# Altium PCB Pcb.PcbDoc
Units mil, origin at the board's own origin, x right, y up, seen from the top; angles counter-clockwise.
Board outline 3220 x 2325 mil, 2 copper layers (Top Layer, Bottom Layer); 32 components, 24 nets, 118 pads, 26 vias.
Unrouted connection lines stored in the file: 4.
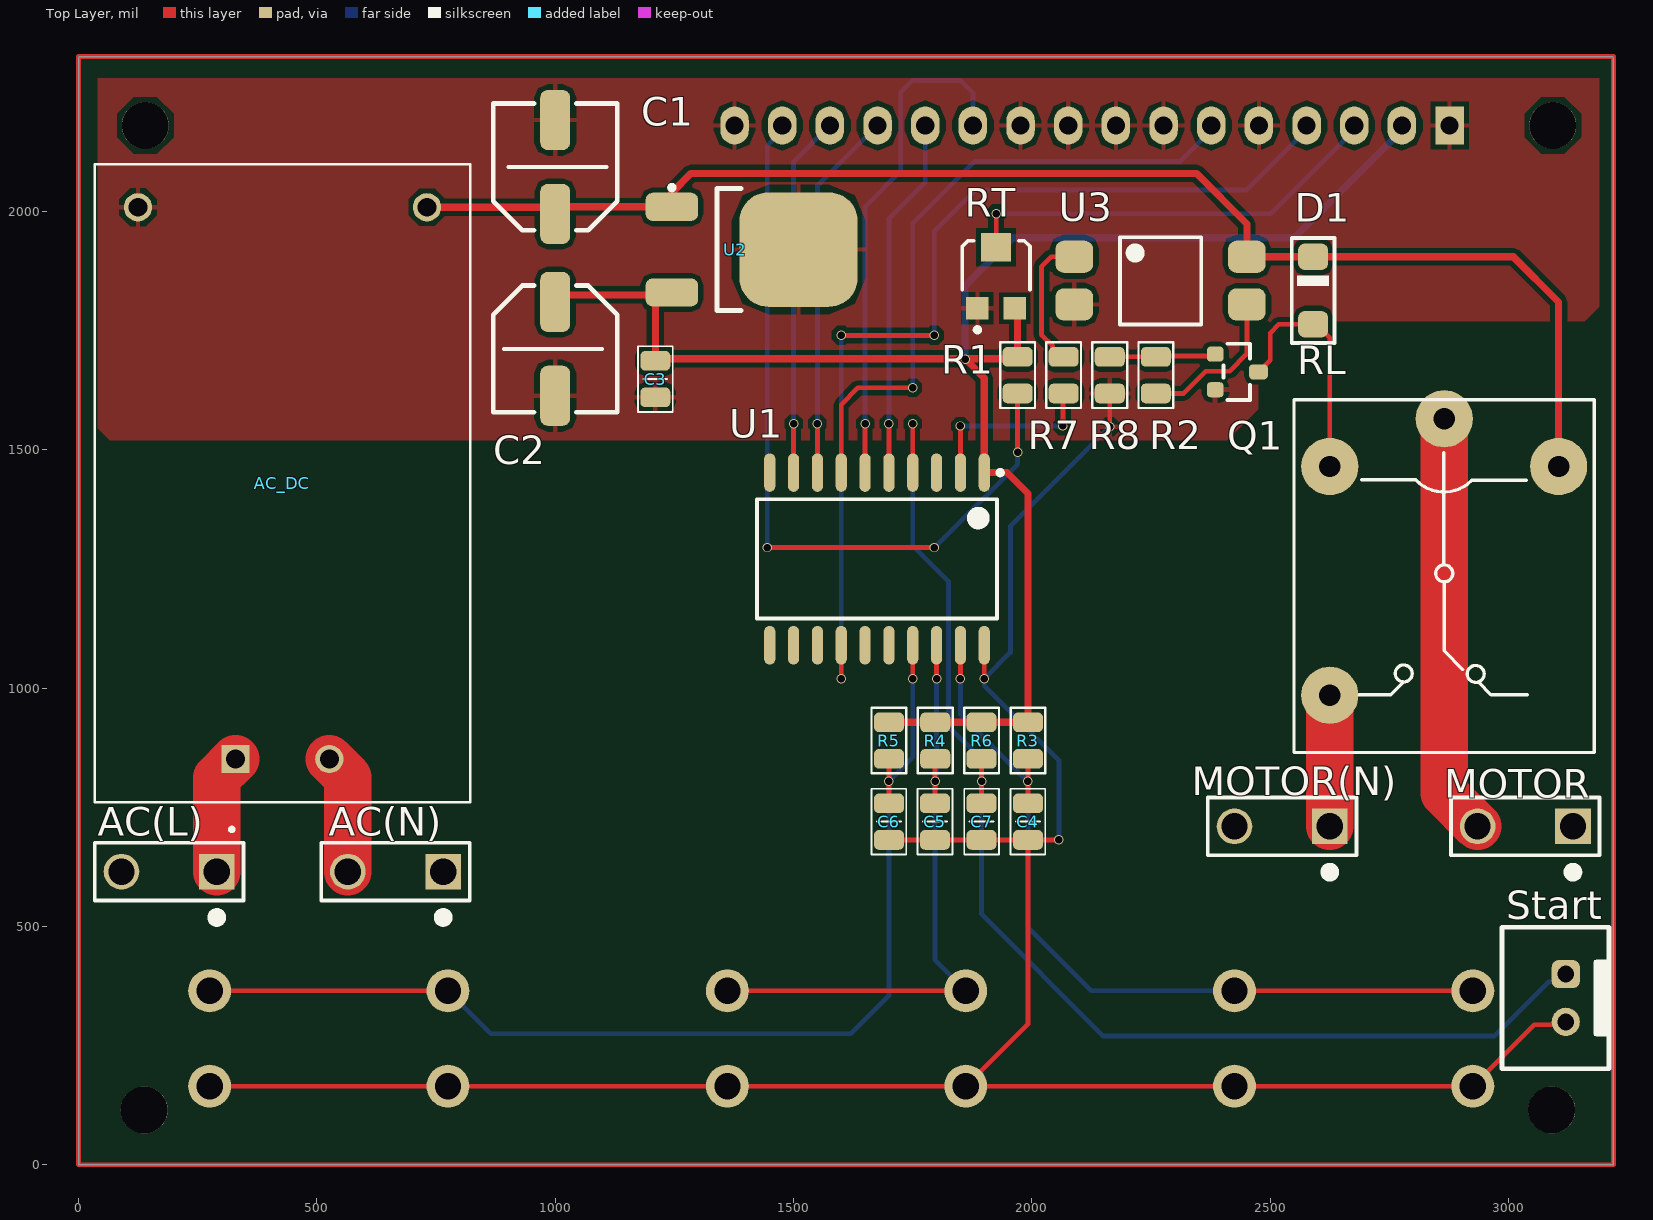
[diagram p0: Top Layer view]
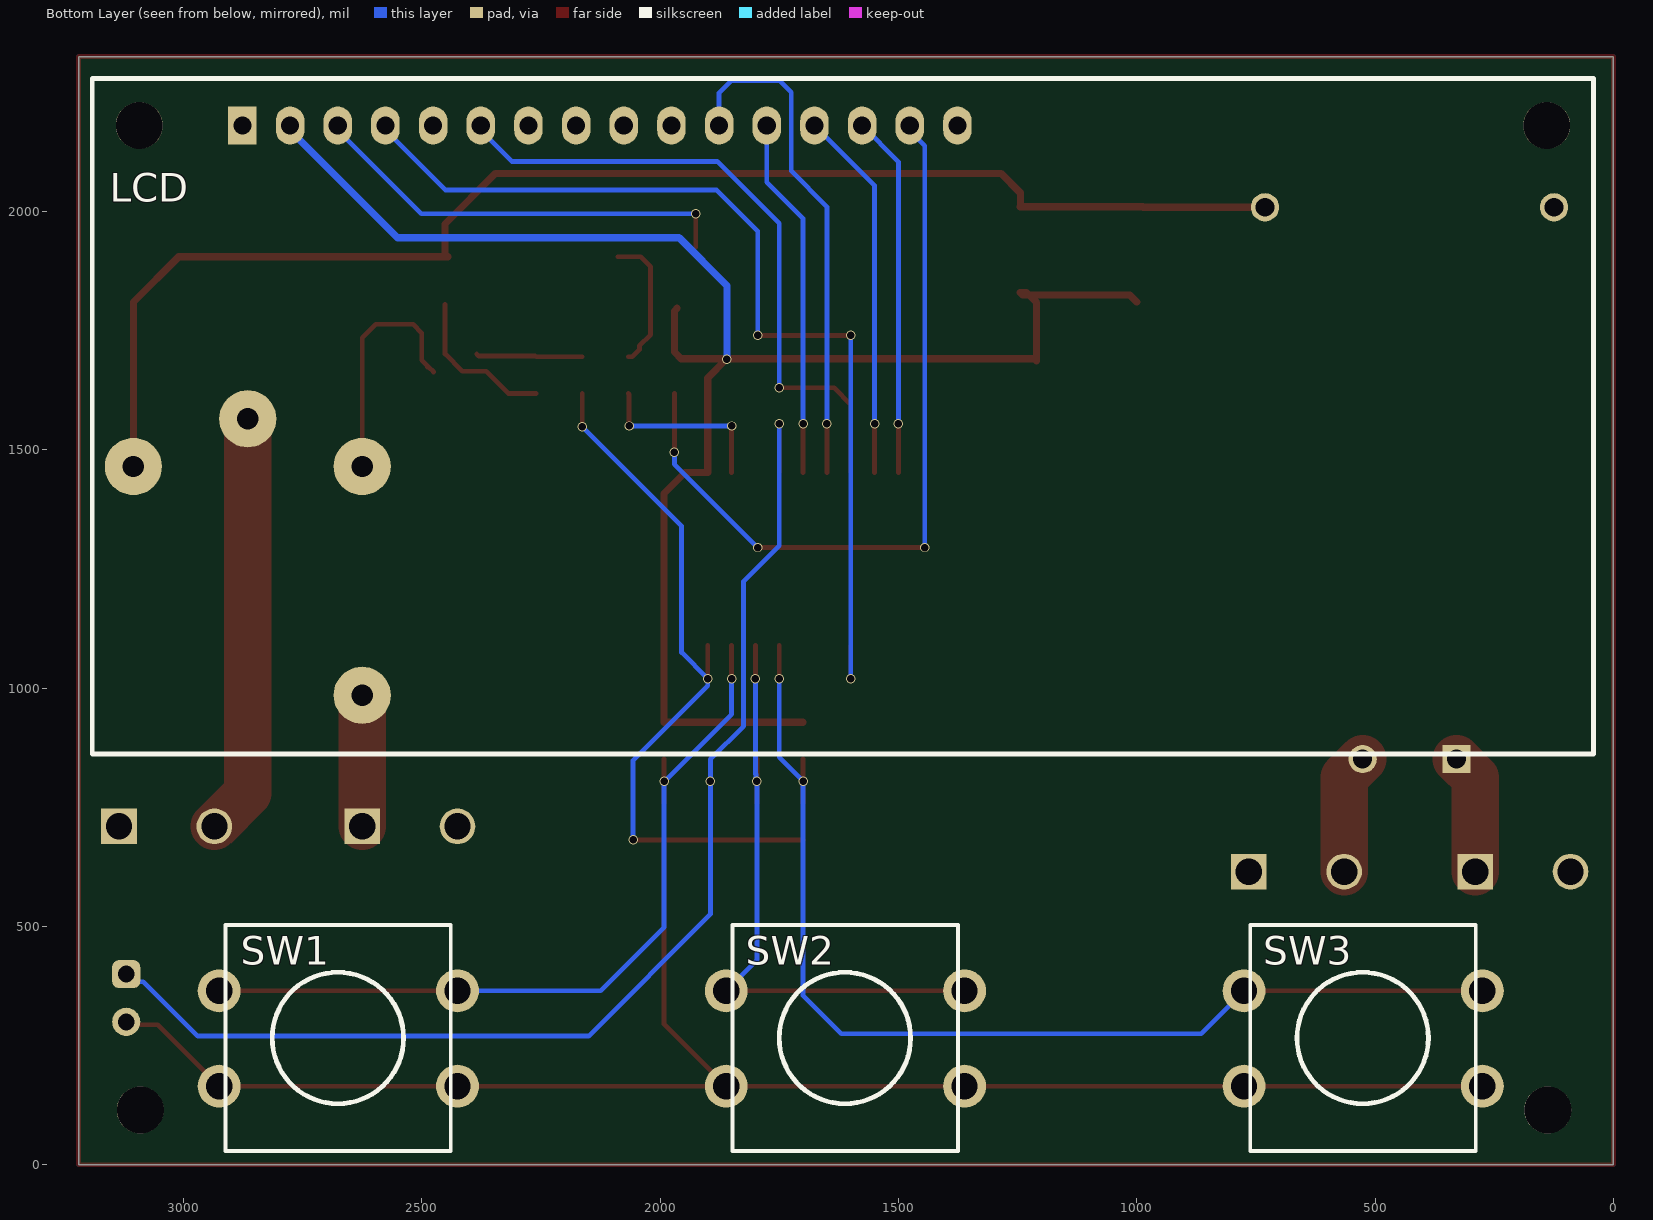
[diagram p1: Bottom Layer view, seen from below]

## Layer stack, top to bottom
Top Solder: solder mask 0.4, Solder Resist, Dk 3.5
Top Layer: signal copper 1.4
Dielectric 1: dielectric 12.6, FR-4, Dk 4.8
Bottom Layer: signal copper 1.4
Bottom Solder: solder mask 0.4, Solder Resist, Dk 3.5

## Board outline
0,0 0,2325 3220,2325 3220,0

## Design rules (kind name [scope] priority, off if disabled: settings)
Clearance [All] p1: gap=10 ignorepadtopadclearanceinfootprint=FALSE except(0: Arc-Hole Track-Hole SMDPad-Hole THPad-Hole Via-Hole Fill-Hole Poly-Hole Region-Hole Text-Hole)
PolygonConnect [All] p1: connectstyle=Relief reliefconductorwidth=10 reliefentries=4 polygonreliefangle="90 Angle" airgapwidth=10
RoutingVias [All] p1: holewidth=15.75 width=19.68 viastyle="Through Hole" minholewidth=15.75 minwidth=19.68 maxholewidth=15.75 maxwidth=19.68
SolderMaskExpansion [All] p1: expansion=4 istentingtop=FALSE
Width Power(5-12) [InNet('+12')] p1: maxlimit=15 minlimit=15 preferedwidth=15
Width 220V [InNet('NetAC(L)_1')] p2: maxlimit=100 minlimit=100 preferedwidth=100
Width Signal [All] p3: maxlimit=20 minlimit=10 preferedwidth=10 minimp=50.000000 maximp=50.000000 favimp=50.000000
30 further rules are at their usual default settings.

## Classes and differential pairs
component class Schematic: AC(L) AC_DC C1 C2 C3 C4 C5 C6 C7 D1 LCD MOTOR(N) Q1 R1 R2 R3 R4 R5 R6 R7 R8 RL RT Start SW1 SW2 SW3 U1 U2 U3

## Components (designator, comment, footprint, x,y, rotation, side; value= is the part's Value field where it differs from the comment)
AC(L) "63824-1" TECO-63824-1_V 190,615 r180 top
AC(N) "63824-1" TECO-63824-1_V 665,615 r180 top
AC_DC "HLK-PM01" CONV_HLK-PM01 427.8,1430 r90 top
C1 "25v/220uF" "C SMD ALU (D8)" 1000,2093.43 r90 top
C2 "16V/220uF" "C SMD ALU (D8)" 1000,1711.81 r270 top
C3 "104" "C 0805 (2012)" 1210,1648.39 r270 top
C4 "104" "C 0805 (2012)" 1991.67,720 r270 top
C5 "104" "C 0805 (2012)" 1796.67,720 r270 top
C6 "104" "C 0805 (2012)" 1700,720 r270 top
C7 "104" "C 0805 (2012)" 1894.44,720 r270 top
D1 "Diode" SOD-80 2590,1834.13 r90 top
LCD "LCD 16x2" "LCD 16x2" 2876.22,2180.47 r180 bottom
MOTOR "63824-1" TECO-63824-1_V 3035,710 r180 top (schematic designator AC(N)_M)
MOTOR(N) "63824-1" TECO-63824-1_V 2525,710 r180 top (schematic designator MOTOR)
Q1 "Transistor NPN" SOT-23 2429.9,1663.41 r0 top
R1 "470" "R 0805 (2012)" 1970,1656.61 r270 top
R2 "470" "R 0805 (2012)" 2260,1656.61 r270 top
R3 "10k" "R 0805 (2012)" 1991.67,890 r90 top
R4 "10k" "R 0805 (2012)" 1797.22,890 r90 top
R5 "10k" "R 0805 (2012)" 1700,890 r90 top
R6 "10k" "R 0805 (2012)" 1894.44,890 r90 top
R7 "1k" "R 0805 (2012)" 2066.67,1656.61 r270 top
R8 "47k" "R 0805 (2012)" 2163.33,1656.61 r270 top
RL "Relay 10A/12V" RL_SPDT_10A 2865,1565 r270 top value="Relay SPDT, 10A, 12V"
RT "TC33X-2-103E" BOUR-TC33X-2_V 1925,1867.91 r90 top
Start "Header 2" XH2.54-2P 3120,400 r270 top
SW1 "Tact Switch" "SW/4/DIP 12x12x7" 2425,365 r0 bottom
SW2 "Tact Switch" "SW/4/DIP 12x12x7" 1361.3,365 r0 bottom
SW3 "Tact Switch" "SW/4/DIP 12x12x7" 275,365 r0 bottom
U1 "PIC16F1829-I/SO" MCHP-SOIC-SO20_N 1675,1271.1 r270 top
U2 "L7xxx" "TO-252 (DPAK)" 1420,1920 r0 top
U3 "PC817B" SOIC-4-GULLWING 2270,1855 r0 top

## Footprints (in the part's own frame and the unit in brackets; to place one, negate y for a bottom-side part, rotate by r counter-clockwise, add the part's x,y. Pads: shape width x height; smd on the part's side, far side on the other; paste and mask are expansions set on the pad)
BOUR-TC33X-2_V [mm] "SMD, 3-Leads, Body 3.8x3.6mm"
  rect 1.2x1.2 smd: 1(-1.8,1) 3(-1.8,-1)
  rect 1.5x1.6 smd: 2(1.45,0)
  silkscreen extent -3.07,-1.8 1.8,1.8, body extent -2,-1.8 1.96,1.8, height 1.15
"C 0805 (2012)" [mm] "Chip Capacitor, 2-Leads, Body 2.0x1.3mm, IPC Medium Density"
  rrect50% 1.05x1.6 smd: 1(-0.975,0) 2(0.975,0)
  silkscreen extent -1.75,-0.92 1.75,0.92, body extent -1,-0.62 1,0.63, height 0.6
"C SMD ALU (D8)" [mm] "SMD Aluminum Electrolytic Capacitor, size D8 (6.3 x 7.7 mm)"
  rrect50% 3.2x1.6 smd: 1(-2.5,0) 2(2.5,0)
  silkscreen extent -3.37,-3.31 3.37,3.31, body extent -3.5,-3.31 3.5,3.29, height 7.7
CONV_HLK-PM01 [mm]
  rect 1.508x1.508 / inner round 1.508 / far side rect 1.508x1.508 hole 1: 1(-14.7,2.5)
  round 1.508 hole 1: 2(-14.7,-2.5) 3(14.7,7.7) 4(14.7,-7.7)
  silkscreen extent -18.55,-10 17,10, body extent -17,-10.1 17,10.1, height 15
"LCD 16x2" [mil]
  rect 60x80 / inner round 60 / far side rect 60x80 hole 38: 1(0,0)
  oval 60x80 / inner round 60 / far side oval 60x80 hole 38: 2(100,0) 3(200,0) 4(300,0) 5(400,0) 6(500,0) 7(600,0) 8(700,0) 9(800,0) 10(900,0) 11(1000,0) 12(1100,0) 13(1200,0) 14(1300,0) 15(1400,0) 16(1500,0)
  round 98.43 hole 98.43: HOLE(-216.54,0) HOLF(2736.22,0)
  round 0 on Top Overlay: HOLG(2736.22,-1220.47) HOLH(-216.54,-1220.47)
  silkscreen extent -315,-1319 2835,98, body extent -314,-1318 2845,100, height 710
MCHP-SOIC-SO20_N [mm] "SOIC, 20-Leads, Body 12.8x7.5mm, Pitch 1.27mm, IPC Medium Density"
  oval 2.05x0.6 smd: 1(-4.6,5.715) 2(-4.6,4.445) 3(-4.6,3.175) 4(-4.6,1.905) 5(-4.6,0.635) 6(-4.6,-0.635) 7(-4.6,-1.905) 8(-4.6,-3.175) 9(-4.6,-4.445) 10(-4.6,-5.715) 11(4.6,-5.715) 12(4.6,-4.445) 13(4.6,-3.175) 14(4.6,-1.905) 15(4.6,-0.635) 16(4.6,0.635) 17(4.6,1.905) 18(4.6,3.175) 19(4.6,4.445) 20(4.6,5.715)
  silkscreen extent -4.72,-6.4 3.18,6.69, body extent -3.75,-6.4 3.75,6.4, height 2.65
"R 0805 (2012)" [mm] "Chip Resistor, 2-Leads, Body 2.0x1.3mm, IPC Medium Density"
  rrect50% 1.05x1.6 smd: 1(-0.975,0) 2(0.975,0)
  silkscreen extent -1.75,-0.92 1.75,0.92, body extent -1,-0.61 1,0.59, height 0.5
RL_SPDT_10A [mil] "Relay SPDT, 5 pin, 10A,W 650mil, L 800mil, H 800mil"
  round 120 hole 45: 1(0,0) 3(580,-240) 4(100,-240) 5(100,240)
  round 0 all layers, no hole: 2(580,240)
  silkscreen extent -40,-315 700,315, body extent -31,-305 721,305, height 602
SOD-80 [mm] "SOD-80 MiniMelf Diod case LL4148 3.7x1.6x0.5mm"
  rrect50% 1.4x1.6 smd: 1(1.8,0) 2(-1.8,0)
  silkscreen extent -2.79,-1.14 2.79,1.14, body extent -1.8,-0.74 1.8,0.76, height 1.5
SOIC-4-GULLWING [mm]
  rrect50% 2x1.71 smd: 1(-4.6,1.27) 2(-4.6,-1.27) 3(4.6,-1.27) 4(4.6,1.27)
  silkscreen extent -2.16,-2.34 2.16,2.31, body extent -5,-2.29 5,2.29, height 3.83
SOT-23 [mm] "SOT23, 3-Leads, Body 3.0x2.5mm (max), Pitch 0.95mm, IPC Medium Density"
  rrect50% 0.9x0.8 smd: 1(-1.15,0.95) 2(-1.15,-0.95)
  rrect50% 1x0.8 smd: 3(1.15,0)
  silkscreen extent -0.71,-1.5 0.7,1.5, body extent -1.28,-1.46 1.27,1.46, height 0.95
"SW/4/DIP 12x12x7" [mil]
  round 90 hole 55: 1(0,0) 4(500,0)
  round 90 hole 55 mask+4: 2(0,200) 3(500,200)
  silkscreen extent 14,-138 487,336, body extent -11,-137 511,335, height 309
TECO-63824-1_V [mm] "THD, 2-Leads, Body 7.92x3.08mm, Pitch 5.08mm"
  rect 1.9x1.9 hole 1.4: 1(-2.54,0)
  round 1.9 hole 1.4: 2(2.54,0)
  silkscreen extent -3.96,-1.54 3.96,2.69, body extent -3.96,-1.55 3.96,1.54, height 10.21
"TO-252 (DPAK)" [mm] "D-PAK, 3-Pads, Body 6.2x6.7mm (max), IPC Medium Density"
  rrect50% 2.8x1.5 smd: 1(-4.45,2.28) 3(-4.45,-2.28)
  rrect50% 6.3x6.1 smd: 2(2.3,0)
  silkscreen extent -4.57,-3.25 -0.75,3.43, body extent -5,-3.27 4.94,3.27, height 2.41
XH2.54-2P [mm]
  rrect50% 1.5x1.5 hole 0.9: 1(0,0)
  round 1.5 hole 0.9 mask+0.102: 2(2.54,0)
  silkscreen extent -2.5,-3.4 5.04,2.4, body extent -2.47,-3.4 5.03,2.4, height 7.25

## Part data
AC(L) AC(N) MOTOR MOTOR(N): library part CMP-1684-00002-4, "Printed Circuit Board Terminal and Disconnect, 2-Pin THD, RoHS, Tape and Reel", Colour=Silver, Manufacturer="TE Connectivity", Package Quantity=10000, ComponentLink1Description="Manufacturer URL", ComponentLink1URL=http://www.te.com/, ComponentLink2Description=Datasheet, ComponentLink2URL=http://www.te.com/commerce/DocumentDelivery/DDEController?Action=showdoc&DocId=Customer+Drawing%7F63824%7FR%7Fpdf%7FEnglish%7FENG_CD_63824_R_baseFilename.pdf%7F63824-1, Contact Material=Brass, Contact Plating=Tin, DatasheetVersion="Rev. R, 06/2013", Length="13.63 mm", Mounting Technology="Through Hole", PackageDescription="2-Pin Through Hole Device, Body 7.92 x 3.08 mm, Pitch 5.08 mm", PackageReference=63824-1, Packaging="Tape and Reel", REACH SVHC=Unknown, RoHSCompliant=True
AC_DC: "The HLK-PM01 is a small size low cost AC to DC converter which can take in 110V/220V AC at 50/60 Hz and give 5V 3W output. The module is can be used in designs which run on 5V and needs to be powered form the AC mains.", Package=None, Availability="Not in stock", Check_prices=https://www.snapeda.com/parts/hlk-pm01/Hi-link/view-part/?ref=eda, MF=Hi-link, MP=hlk-pm01, Price=None, SnapEDA_Link=https://www.snapeda.com/parts/hlk-pm01/Hi-link/view-part/?ref=snap
C1 C2: library part Capacitor, "Capacitor pol"
C3 C4 C5 C6 C7: library part "Capacitor NP", "Capacitor non-pol"
D1: "Default Diode", Code_JEDEC=DO-214-AB, LatestRevisionDate=17-Jul-2002, LatestRevisionNote="Re-released for DXP Platform.", PackageReference=SMC, PackageVersion=Sep-1996, Published=8-Jun-2000, Publisher="Altium Limited"
LCD: "Character LCD 16x2"
Q1: "NPN Bipolar Transistor"
R1 R2 R3 R4 R5 R6 R7 R8: library part Resistor, "Resistor", LatestRevisionDate=17-Jul-2002, LatestRevisionNote="Re-released for DXP Platform.", PackageReference=AXIAL-0.3, Published=8-Jun-2000, Publisher="Altium Limited"
RL: library part "Relay 1", "Relay SPDT,10A - 12VDC 5 Pin"
RT: library part CMP-2100-03695-1, "Trimming Potentiometer, 10000 Ohm, -40 to 100 degC, 3-Pin SMD, RoHS, Tape and Reel", Case/Package=SMD/SMT, Colour=Silver, Manufacturer=Bourns, Max Operating Temperature=100degC, Max Power Dissipation=100mW, Min Operating Temperature=-40degC, Package Description="3-Pin Surface Mount Device, Body 3.8 x 3.6 mm", Package Quantity=2500, Package Reference=TC33X-2, Resistance=10KOhm, Temperature Coefficient=250ppm/degreesC, Tolerance=25%, Voltage Rating (DC)=50V, Composition=Potentiometer, Contact Plating=Silver, Datasheet URL=http://www.bourns.com/docs/Product-Datasheets/TC33.pdf, Datasheet Version=42583.0, Depth=3.8mm, Height=0.047inch, Lead Free=LeadFree, Length=3mm, Manufacturer URL=http://www.bourns.com/, Military Standard=Not, Mount=SurfaceMount, Number of Turns=1, Packaging=TapeandReel, Power Rating=100mW, Radiation Hardening=No, REACH SVHC=NoSVHC, RoHSCompliant=true, Taper=Linear, Termination=FootPrint, Weight=29.4mg, Width=0.118inch
Start: "Header, 2-Pin", LatestRevisionDate=17-Jul-2002, LatestRevisionNote="Re-released for DXP Platform.", Publisher="Altium Limited"
SW1 SW2 SW3: library part "SW SPST-4", "Tact switch 4 pin"
U1: library part CMP-0115-02414-1, "Flash Microcontroller with XLP Technology, 32 MHz, 17 I/O, -40 to 85 degC, 20-pin SOIC (SO20), Tube", Manufacturer=Microchip, Operation Voltage Range="1.8V - 5.5V", # of A/D Channels=12, ComponentLink1Description=Datasheet, ComponentLink1URL=http://ww1.microchip.com/downloads/en/DeviceDoc/41440C.pdf, ComponentLink2Description="Package Specification", ComponentLink2URL=http://www.microchip.com/stellent/groups/techpub_sg/documents/packagingspec/en012702.pdf, ComponentLink3Description="URL Link1", ComponentLink3URL="Product URL:http://www.microchip.com/datasheet/PIC16F1829", DatasheetVersion="Rev. C", Digital Communication="1 -A/E/USART, 2 -MSSP(SPI/I2C)", EEPROM Data Memory (bytes)=256, I/O Pins=17, Internal Oscillator="32 MHz, 31 kHz", Max. CPU Speed MHz=32, Memory Type=Flash, Mounting Technology="Surface Mount", PackageDescription="20-Lead Plastic Small Outline, 7.5 x 12.8 mm Body, 1.27 mm Pitch", PackageReference=SOIC-SO20, PackageVersion="C04-094C, 12/2012", Packing=TUBE, PartNumber=PIC16F1829-I/SO, Program Memory KBytes=14, Program Memory KWords=8, RAM=1024, RoHS=TRUE, Timers="4 - 8-bit, 1 - 16-bit"
U2: "LDO Fixed Voltage regulator"
U3: library part "Opto PC817B"

## Free pads (board coordinates)
  round 98.43 hole 98.43: HOLD(137.6,115) HOLD(3090.36,115)

## Via types
v1: diameter 19.68, hole 15.75, Top Layer to Bottom Layer, 26 vias

## Nets (pads, with @x,y where several pads share a name; then routed paths per layer and width w, separated by ;. In a path a pad name is that pad's centre, name@x,y a point inside that pad or via, vN(x,y) a via of type N, cw(c..) or ccw(c..) an arc to the next point about the centre after c; other vN are vias at no path point)
+5: C2.1 C3.1 LCD.2 R1.1 R3.2 R4.2 R5.2 R6.2 RT.3 U1.1 U2.3 | length 3632.8
  Top Layer w15: C2.1 1014.76,1825 1239.57,1825 U2.3 1231.47,1830.24 1210,1808.76 C3.1 1214.11,1690.89 1955.89,1690.89 1970,1705 1970,1791.42 RT.3 ; R5.2 R4.2 R6.2 R3.2 1991.67,1408.33 1947.8,1452.2 U1.1 1900,1650.89 v1@1860.44,1690.44
  Bottom Layer w15: v1(1860,1690) 1860,1845 1960,1945 2550.75,1945 2776.22,2170.47 LCD.2
+12: AC_DC.4 C1.1 D1.1 RL.5 U2.1 U3.4 | length 2924.3
  Top Layer w15: AC_DC.4 986.26,2008.74 987.28,2009.76 U2.1@1244.25,2009.76 ; U2.1 U2.1@1244.25,2009.76 ; U3.4@2445.39,1905 D1.1 3010,1905 3105,1810 RL.5 ; U3.4 2451.1,1973.9 2345,2080 1285,2080 1244.25,2039.25 U2.1@1244.25,2009.76
GND: AC_DC.3 C1.2 C2.2 C3.2 C4.2 C5.2 C6.2 C7.2 LCD.1 LCD.5 LCD.7 LCD.8 LCD.9 LCD.10 LCD.16 Q1.2 R8.2 RT.1 Start.2 SW1.2 SW1.3 SW2.2 SW2.3 SW3.2 SW3.3 U1.20 U2.2 U3.2 | length 5008.7
  Top Layer w10: SW3.2 SW3.3 SW2.2 SW2.3 ; C6.2 C5.2 C7.2 C4.2 ; v1(1900,1020) U1.20 ; v1(2056.61,681.61) C4.2 ; v1(2163.33,1548.33) R8.2 ; Start.2 3113.82,293.82 3053.82,293.82 SW1.3 SW1.2 SW2.3 ; SW2.3 1991.67,295.36 C4.2
  Bottom Layer w10: v1(2056.61,681.61) 2056.61,848.39 1900.07,1004.93 1900.07,1019.93 v1(1900,1020) 1955,1075 1955,1340 v1(2163.33,1548.33)
NetAC(L)_1: AC(L).1 AC(L).2 AC_DC.1 | length 252.6
  Top Layer w100: 290,615 290,811.89 AC_DC.1
NetAC(N)_1: AC(N).1 AC(N).2 AC_DC.2 | length 252.3
  Top Layer w100: AC_DC.2 565,812.48 565,615
NetAC(N)_M_1: MOTOR.1 MOTOR.2 RL.1 | length 884
  Top Layer w100: RL.1 2865,780 MOTOR.2
NetD1_2: D1.2 Q1.3 RL.4 | length 507.5
  Top Layer w10: Q1.3 2485,1673.23 2487.38,1673.23 2488.08,1673.93 2488.08,1676.32 2500,1688.23 2500,1745 2518.27,1763.27 2596.58,1763.27 2625,1734.85 RL.4
NetLCD_3: LCD.3 RT.2 | length 903.9
  Top Layer w10: RT.2 v1(1925,1995)
  Bottom Layer w10: v1(1925,1995) 2500.75,1995 2676.22,2170.47 LCD.3
NetLCD_15: LCD.15 R1.2 | length 1644.1
  Top Layer w10: v1(1445,1295) v1(1795,1295) ; v1(1970,1495) R1.2
  Bottom Layer w10: v1(1445,1295) 1445,2138.05 1476.22,2169.27 LCD.15 ; v1(1795,1295) 1970,1470 v1(1970,1495)
NetMOTOR_1: MOTOR(N).1 MOTOR(N).2 RL.3 | length 275
  Top Layer w100: 2625,710 RL.3
NetQ1_1: Q1.1 R2.1 R8.1 | length 223.7
  Top Layer w10: R8.1 R2.1 2261.7,1696.7 2380.51,1696.7 Q1.1
NetR2_2: R2.2 U3.3 | length 329.3
  Top Layer w10: R2.2 2318.23,1618.23 2365,1665 2415,1665 2451.1,1701.1 U3.3
NetR7_1: R7.1 U3.1 | length 290.7
  Top Layer w10: R7.1 2058.73,1695 2043.46,1710.26 2043.46,1718.2 2020,1741.67 2020,1884.14 2040.86,1905 U3.1
RA0: C4.1 R3.1 SW1.1 SW1.4 U1.19 | length 1733.1
  Top Layer w10: v1(1850,1020) U1.19 ; C4.1 v1(1991.67,805) R3.1 ; SW1.1 SW1.4
  Bottom Layer w10: v1(1850,1020) 1850,945 1990,805 v1(1991.67,805) 1991.67,498.33 2125,365 SW1.1
RA1: C5.1 R4.1 SW2.1 SW2.4 U1.18 | length 1346.4
  Top Layer w10: SW2.1 SW2.4 ; C5.1 1796.94,758.66 v1(1796.94,805) 1796.94,851.34 R4.1 ; v1(1800,1020) U1.18
  Bottom Layer w10: v1(1800,1020) 1800,820 1798.8,818.8 1798.8,806.85 v1(1796.94,805) 1796.94,429.36 SW2.4
RA2: C6.1 R5.1 SW3.1 SW3.4 U1.17 | length 2344.4
  Top Layer w10: SW3.1 SW3.4 ; C6.1 v1(1700,805) R5.1 ; v1(1750,1020) U1.17
  Bottom Layer w10: SW3.4 865,275 1620,275 1700,355 v1(1700,805) 1750,855 v1(1750,1020)
RA3: C7.1 R6.1 Start.1 U1.4 | length 2670.6
  Top Layer w10: U1.4 v1(1750,1555) ; C7.1 v1(1894.44,805) R6.1
  Bottom Layer w10: v1(1750,1555) 1750,1298.84 1825,1223.84 1825,920 1894.44,850.56 v1(1894.44,805) 1894.44,525.56 2150,270 2970,270 3084.19,384.19 3104.19,384.19 Start.1
RA5: R7.2 U1.2 | length 381.7
  Top Layer w10: U1.2 v1(1850,1550) ; v1(2065,1550) 2065,1616.56 R7.2
  Bottom Layer w10: v1(1850,1550) v1(2065,1550)
RC2: LCD.4 U1.14 | length 2082.4
  Top Layer w10: v1(1600,1020) U1.14 ; v1(1600,1740) v1(1795,1740)
  Bottom Layer w10: v1(1600,1020) v1(1600,1740) ; v1(1795,1740) 1795,1958.98 1881.02,2045 2450,2045 2576.22,2171.22 LCD.4
RC3: LCD.6 U1.7 | length 1369.5
  Top Layer w10: U1.7 1600,1595 1635,1630 v1(1750,1630)
  Bottom Layer w10: v1(1750,1630) 1750,1975 1880,2105 2310.75,2105 2376.22,2170.47 LCD.6
RC4: LCD.11 U1.6 | length 1069.6
  Top Layer w10: U1.6 v1(1650,1555)
  Bottom Layer w10: v1(1650,1555) 1650,2010 1725,2085 1725,2250 1750,2275 1850,2275 1876.22,2248.78 LCD.11
RC5: LCD.12 U1.5 | length 759.8
  Top Layer w10: U1.5 v1(1700,1555)
  Bottom Layer w10: v1(1700,1555) 1700,1985 1776.22,2061.22 LCD.12
RC6: LCD.13 U1.8 | length 780.5
  Top Layer w10: U1.8 v1(1550,1555)
  Bottom Layer w10: v1(1550,1555) 1550,2054.25 LCD.13
RC7: LCD.14 U1.9 | length 759.8
  Top Layer w10: U1.9 v1(1500,1555)
  Bottom Layer w10: v1(1500,1555) 1500,2104.25 LCD.14
pads on no net: LCD.HOLE LCD.HOLF LCD.HOLG LCD.HOLH RL.2 U1.3 U1.10 U1.11 U1.12 U1.13 U1.15 U1.16
copper on no net: | length 11090
  Top Layer w10: 0,0 3220,0 3220,2325 0,2325 0,0

## Polygon pours and split planes (outlines as drawn)
GND on Top Layer "GND_L01_P000" (solid, remove dead copper, pour order 0): 40,2280 3190,2280 3190,1800 3160,1770 2535,1770 2475,1710 2475,1585 2410,1520 65,1520 40,1545

## Dimensions
3365,2325 to 3340,0 on Top Layer
-5,2385 to 3225,2350 on Top Layer